# Altium PCB Analog voltmeter pcb.PcbDoc
Units mm, origin at the board's own origin, x right, y up, seen from the top; angles counter-clockwise.
Board outline 58.8 x 54.74 mm, 2 copper layers (Top Layer, Bottom Layer); 21 components, 17 nets, 76 pads, 1 vias.
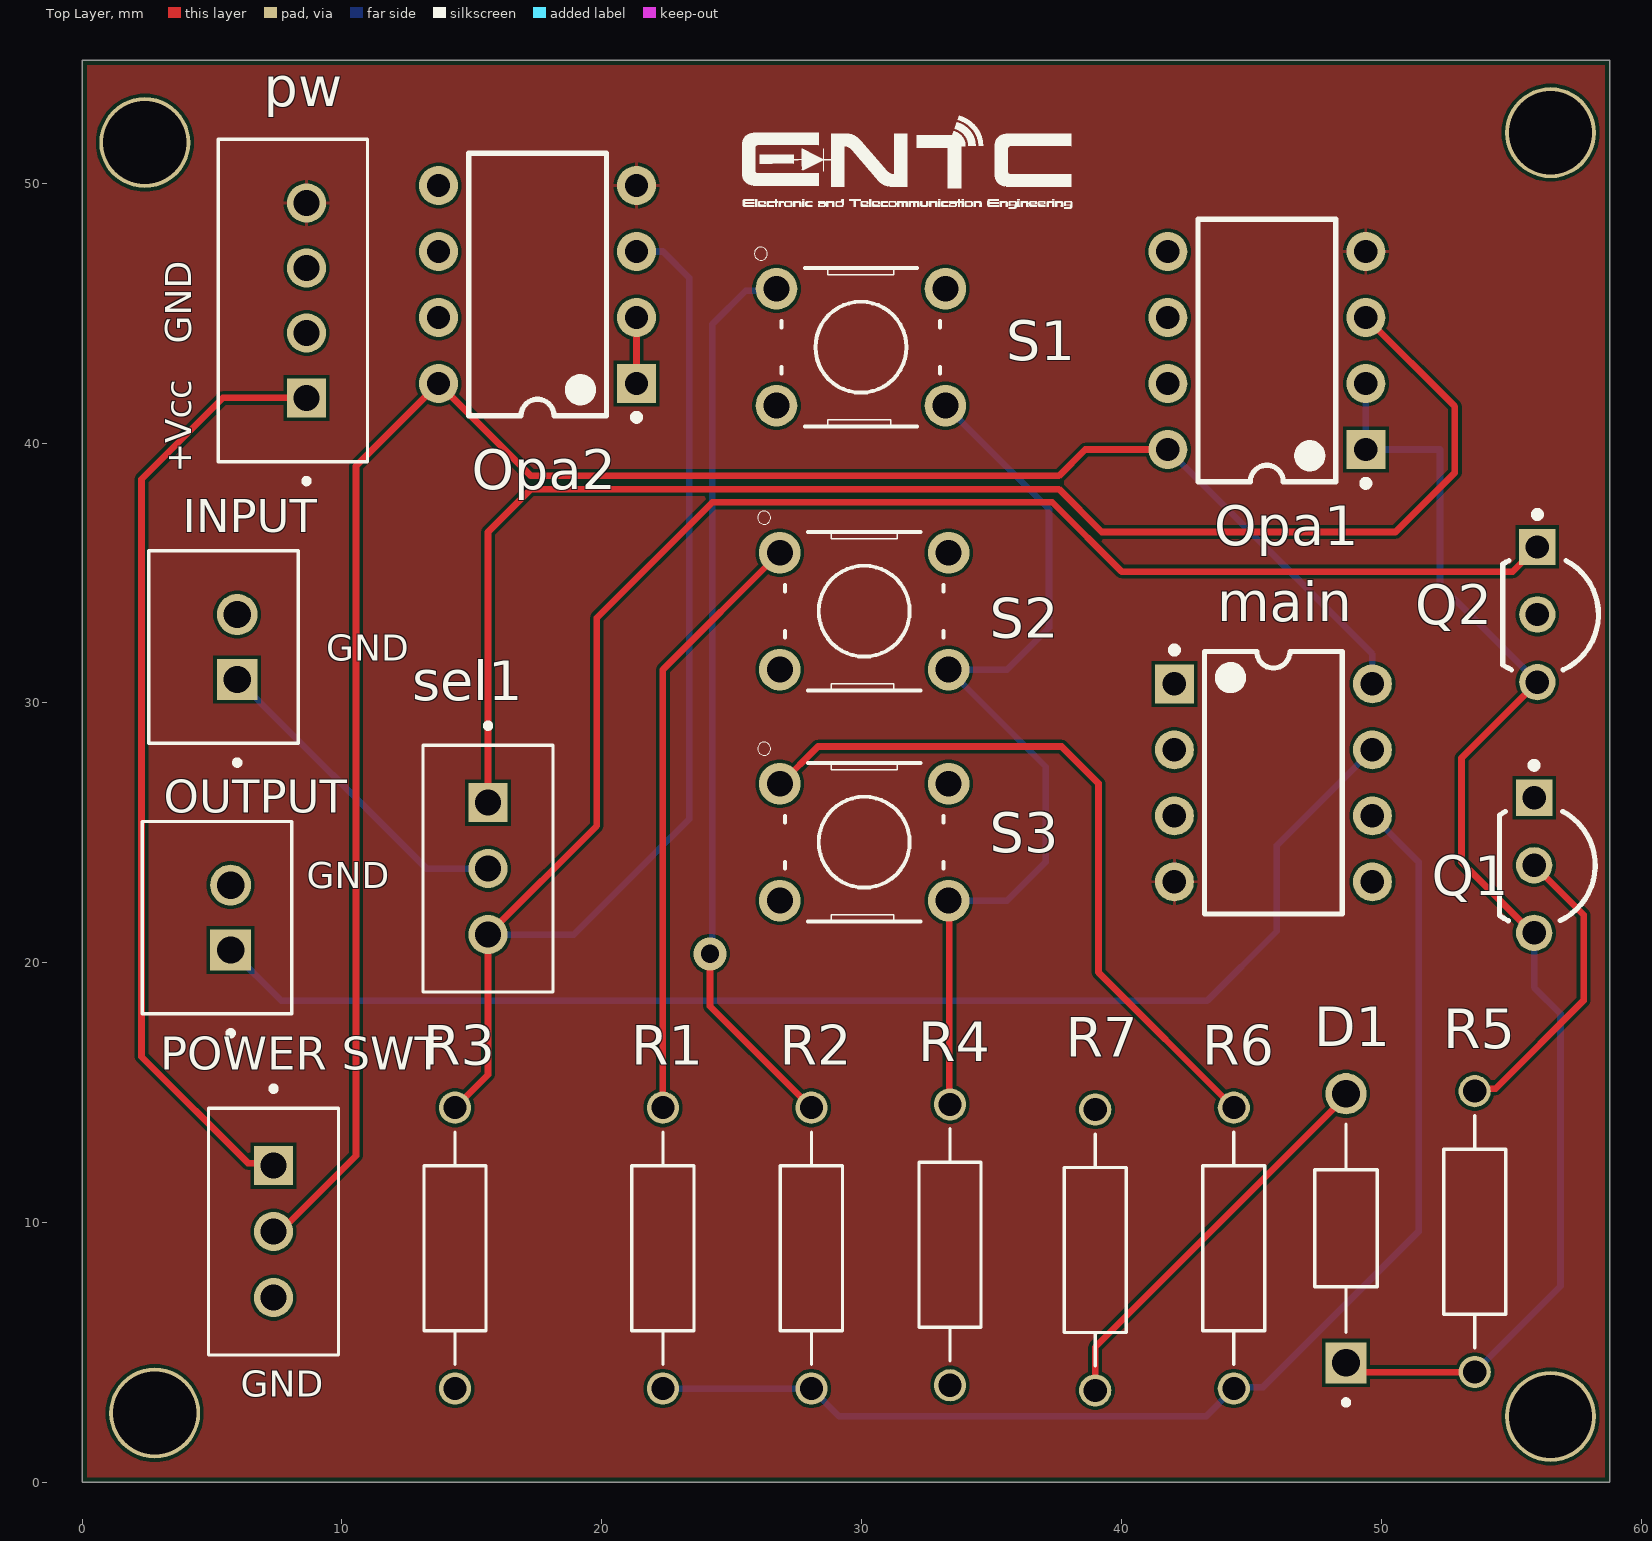
[diagram p0: Top Layer view]
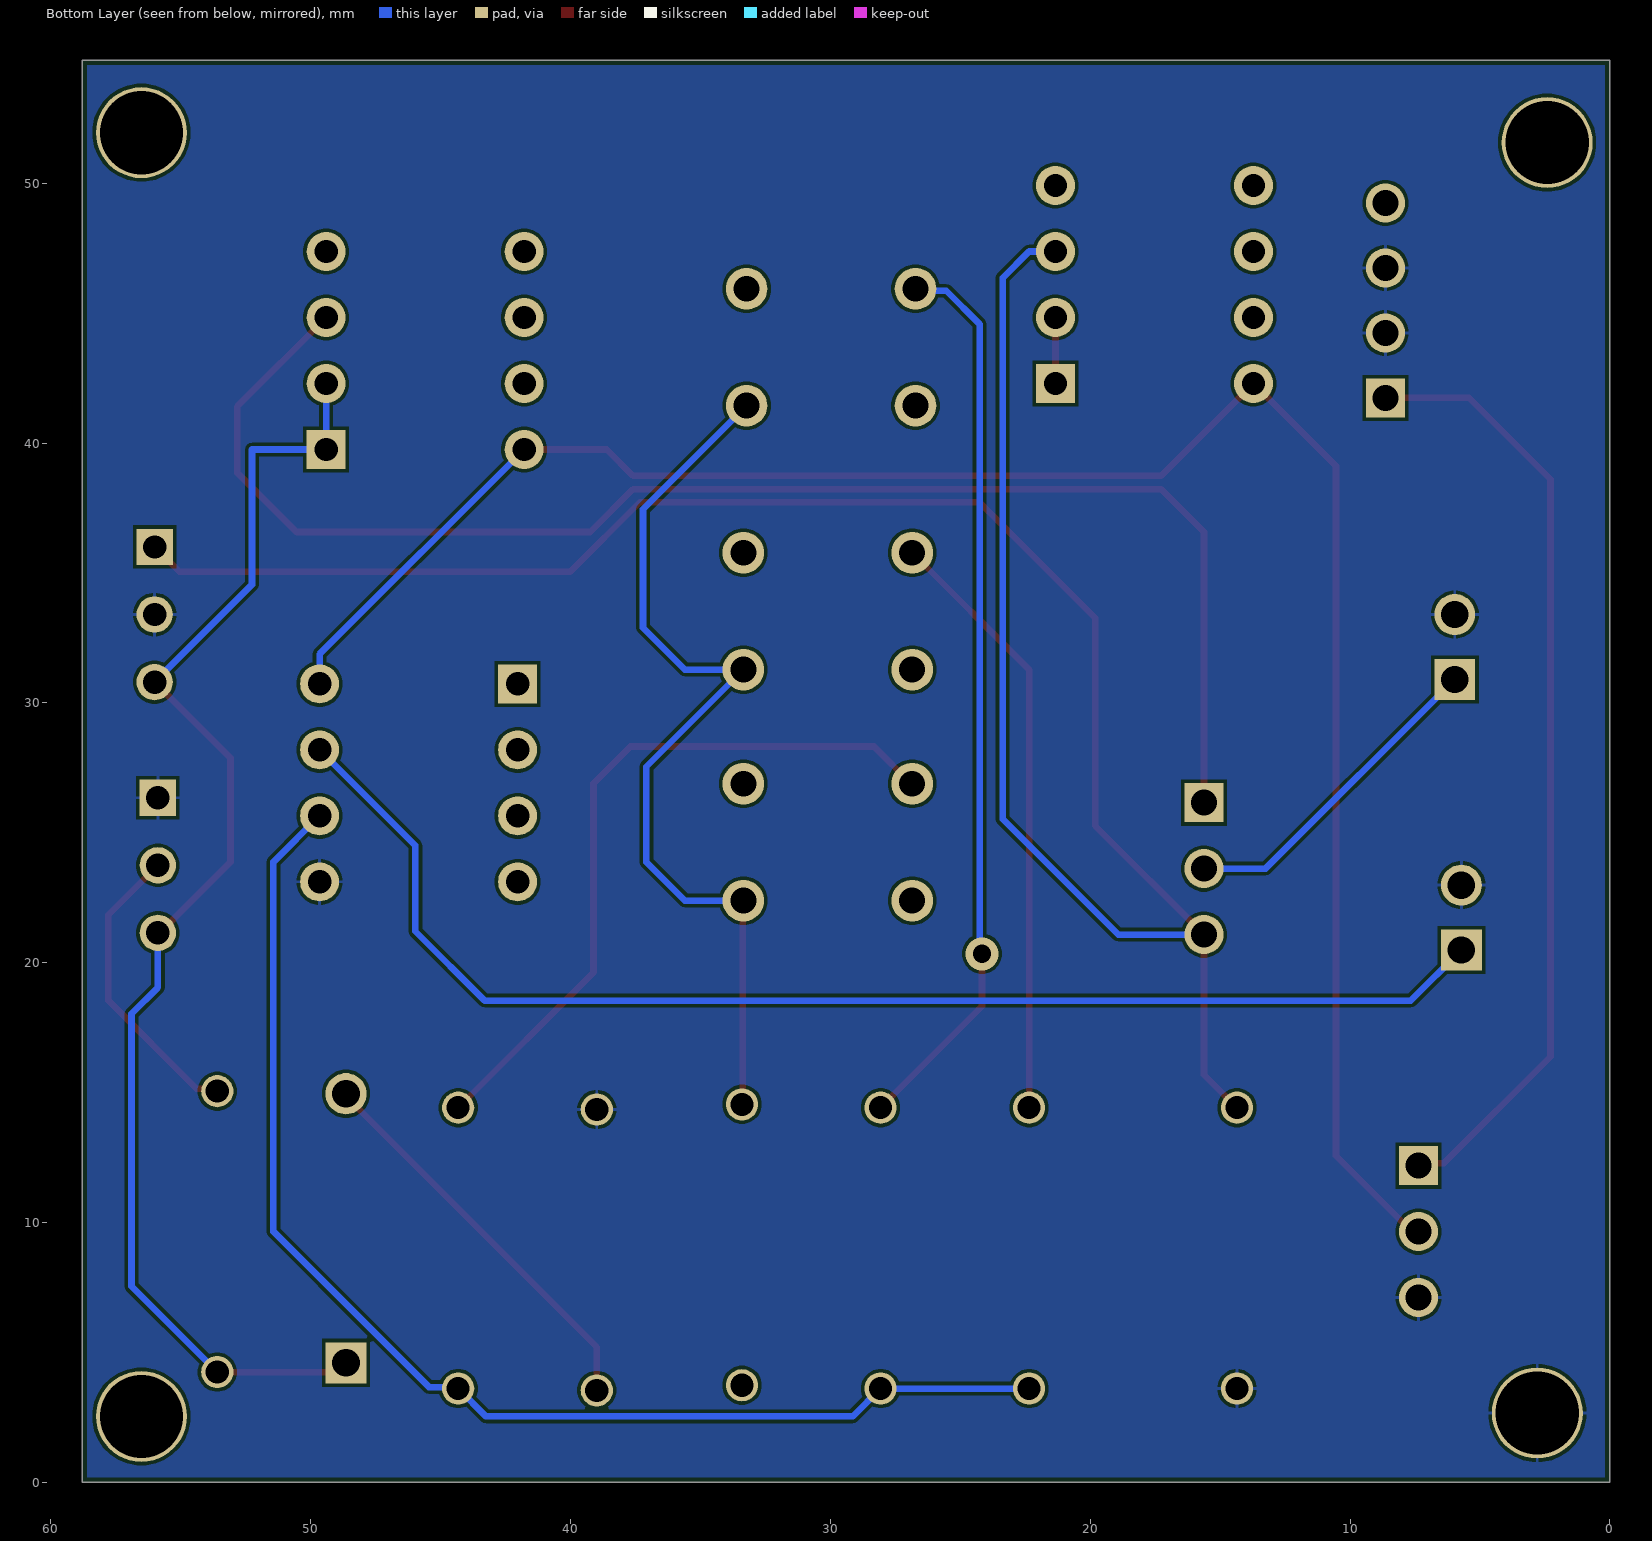
[diagram p1: Bottom Layer view, seen from below]
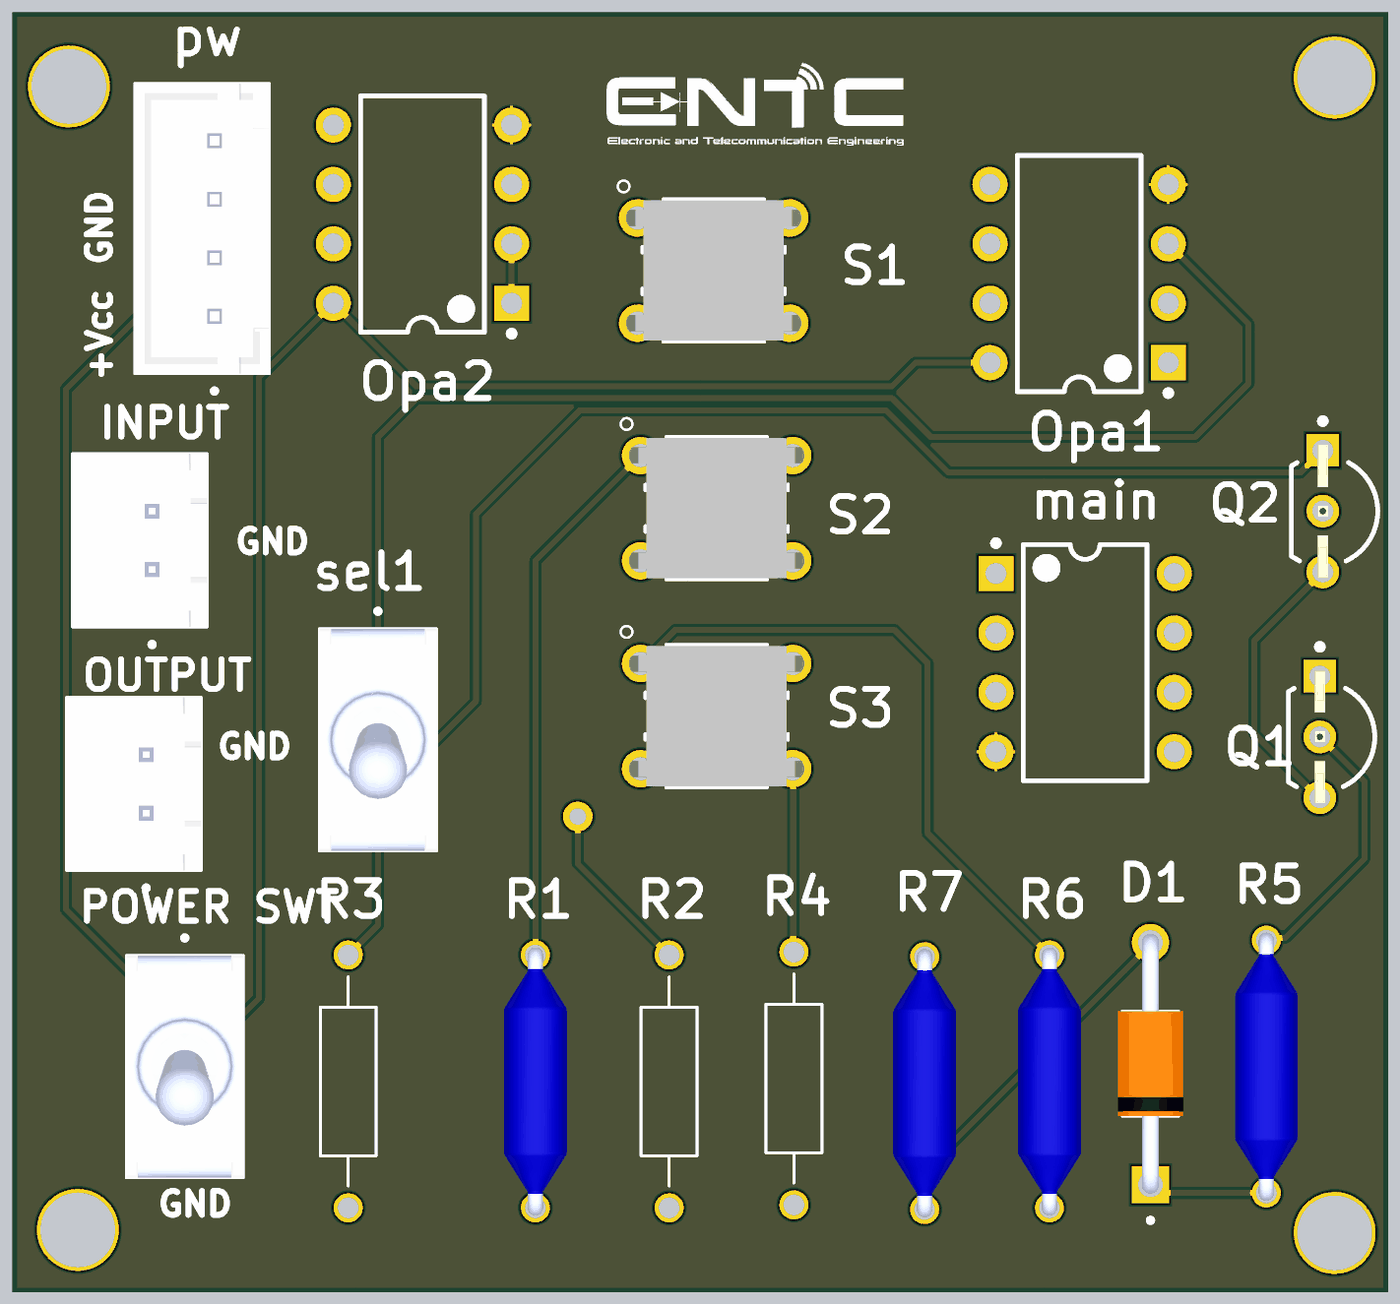
[diagram p2: 3D render of the assembled board from above, using the file's embedded part models]

## Layer stack, top to bottom
Top Solder: solder mask 0.0102, Solder Resist, Dk 3.5
Top Layer: signal copper 0.0356
Dielectric 1: dielectric 0.32, FR-4, Dk 4.8
Bottom Layer: signal copper 0.0356
Bottom Solder: solder mask 0.0102, Solder Resist, Dk 3.5

## Board outline
58.796,54.737 0,54.737 0,0 58.796,0

## Design rules (kind name [scope] priority, off if disabled: settings)
BoardOutlineClearance [All] p1: gap=0.2 ignorepadtopadclearanceinfootprint=FALSE
Clearance [All] p1: gap=0.127 ignorepadtopadclearanceinfootprint=FALSE except(0.25: Arc-Hole Track-Hole SMDPad-Hole THPad-Hole Via-Hole Fill-Hole Poly-Hole Region-Hole Text-Hole)
ComponentClearance [All] p1: gap=0.127 collisioncheckmode=3 verticalgap=0.127 showdistances=TRUE
DiffPairsRouting [All] p1: maxlimit=0.254 minlimit=0.127 mostfreqgap=0.127 toplayer_minwidth=0.127 toplayer_maxwidth=25.4 toplayer_prefwidth=0.127 bottomlayer_minwidth=0.127 bottomlayer_maxwidth=25.4 bottomlayer_prefwidth=0.127 maxuncoupledlength=12.7
Height [All] p1: minheight=0 maxheight=1816.048 prefheight=12.7
HoleSize [All] p1: absolutevalues=TRUE maxlimit=6.3 minlimit=0.3 maxpercent=80.000 minpercent=20.000
HoleToHoleClearance [All] p1: gap=0.25 allowstackedmicrovias=FALSE
MinimumAnnularRing [All] p1: minimumring=0.076
MinimumSolderMaskSliver [All] p1: minsoldermaskwidth=0
PlaneClearance [All] p1: clearance=0.127
PlaneConnect PlaneConnectPowerPads [InPadClass('PowerPads')] p1: planeconnectstyle=Direct reliefexpansion=0.508 reliefentries=4 reliefconductorwidth=0.254 reliefairgap=0.254
PlaneConnect [All] p2: pad.planeconnectstyle=Relief pad.reliefexpansion=0.3 pad.reliefentries=4 pad.reliefconductorwidth=0.127 pad.reliefairgap=0.127 via.planeconnectstyle=Direct via.reliefexpansion=0.3 via.reliefentries=4 via.reliefconductorwidth=0.127 via.reliefairgap=0.127
PolygonConnect PolygonConnectPowerPads [All vs (InPadClass('PowerPads'))] p1: connectstyle=Direct reliefconductorwidth=0.254 reliefentries=4 polygonreliefangle="90 Angle" airgapwidth=0.254
PolygonConnect [All] p2: thpad.connectstyle=Relief thpad.reliefconductorwidth=0.127 thpad.reliefentries=4 thpad.polygonreliefangle="90 Angle" thpad.airgapwidth=0.127 smdpad.connectstyle=Relief smdpad.reliefconductorwidth=0.127 smdpad.reliefentries=4 smdpad.polygonreliefangle="90 Angle" smdpad.airgapwidth=0.127 via.connectstyle=Direct via.reliefconductorwidth=0.127 via.reliefentries=4 via.polygonreliefangle="90 Angle" via.airgapwidth=0.127
RoutingVias [All] p1: holewidth=0.3 width=0.6 viastyle="Through Hole" minholewidth=0.3 minwidth=0.6 maxholewidth=0.6 maxwidth=6.6
SilkToSilkClearance [All] p1: silktosilkclearance=0
SilkToSolderMaskClearance [IsPad] p1: minsilkscreentomaskgap=0.127 clearancetoexposedcopper=TRUE
SolderMaskExpansion [All] p1: expansion=0.075 istentingtop=FALSE
Width [All] p1: maxlimit=25.4 minlimit=0.127 preferedwidth=0.127 minimp=50.000000 maximp=50.000000 favimp=50.000000
20 further rules are at their usual default settings.

## Components (designator, comment, footprint, x,y, rotation, side; value= is the part's Value field where it differs from the comment)
D1 "BZX85C16" DIOAD1036W73L450D282 48.641,9.779 r90 top
INPUT "B2B-XH-A(LF)(SN)" JST_B2B-XH-A(LF)(SN) 5.444,32.151 r90 top
main "LM358N" ONSC-PDIP-8-626-05_M 45.847,26.924 r0 top
Opa1 "LM358N" ONSC-PDIP-8-626-05_M 45.593,43.561 r180 top
Opa2 "LM358N" ONSC-PDIP-8-626-05_M 17.526,46.101 r180 top
OUTPUT "B2B-XH-A(LF)(SN)" JST_B2B-XH-A(LF)(SN) 5.19,21.737 r90 top
"POWER SWT" "ATE1D-2M3-10-Z" SW_ATE1D-2M3-10-Z 7.366,9.652 r90 top
pw "PW" JST_B4B-XH-A(LF)(SN) 8.111,45.486 r90 top
Q1 "BC558BRL1G" ONSC-TO-92-3-29-11_AM_BL 55.88,23.749 r270 top
Q2 "BC558BRL1G" ONSC-TO-92-3-29-11_AM_BL 56.007,33.401 r270 top
R1 "50kohm" RESAD1081W64L635D269 22.352,9.017 r90 top
R2 "100kohm" RESAD1081W64L635D269 28.067,9.017 r270 top
R3 "100kohm" RESAD1081W64L635D269 14.351,9.017 r90 top
R4 "100kohm" RESAD1081W64L635D269 33.401,9.144 r90 top
R5 "4.7kohm" RESAD1081W64L635D269 53.594,9.652 r90 top
R6 "400 kohm" RESAD1081W64L635D269 44.323,9.017 r270 top
R7 "4.7 kohm" RESAD1081W64L635D269 38.989,8.946 r90 top
S1 "B3F-1000" SW_B3F-1000 29.972,43.688 r0 top
S2 "B3F-1000" SW_B3F-1000 30.099,33.528 r0 top
S3 "B3F-1000" SW_B3F-1000 30.099,24.638 r0 top
sel1 "ATE1D-2M3-10-Z" SW_ATE1D-2M3-10-Z 15.621,23.622 r90 top

## Footprints (in the part's own frame and the unit in brackets; to place one, negate y for a bottom-side part, rotate by r counter-clockwise, add the part's x,y. Pads: shape width x height; smd on the part's side, far side on the other; paste and mask are expansions set on the pad)
DIOAD1036W73L450D282 [mm]
  round 1.59 hole 1.06: A(5.18,0)
  rect 1.59x1.59 / inner round 1.59 / far side rect 1.59x1.59 hole 1.06: C(-5.18,0)
  silkscreen extent -6.8,-1.2 4,1.2, body extent -5.55,-1.4 5.55,1.4, height 2.8
JST_B2B-XH-A(LF)(SN) [mm]
  rect 1.575x1.575 / inner round 1.575 / far side rect 1.575x1.575 hole 1.05: 1(-1.25,-0.525)
  round 1.575 hole 1.05: 2(1.25,-0.525)
  silkscreen extent -4.55,-2.87 3.7,2.88, body extent -3.7,-2.88 3.7,2.88, height 7
JST_B4B-XH-A(LF)(SN) [mm]
  rect 1.508x1.508 / inner round 1.508 / far side rect 1.508x1.508 hole 1: 1(-3.75,-0.525)
  round 1.508 hole 1: 2(-1.25,-0.525) 3(1.25,-0.525) 4(3.75,-0.525)
  silkscreen extent -7.05,-2.88 6.2,2.87, body extent -6.2,-2.88 6.2,2.88, height 7
ONSC-PDIP-8-626-05_M [mm] "DIP, 8-Leads, Body 10x7.1mm, Pitch 2.54mm"
  rect 1.5x1.5 hole 0.9: 1(-3.81,3.81)
  round 1.5 hole 0.9: 2(-3.81,1.27) 3(-3.81,-1.27) 4(-3.81,-3.81) 5(3.81,-3.81) 6(3.81,-1.27) 7(3.81,1.27) 8(3.81,3.81)
  silkscreen extent -3.93,-5.05 2.65,5.23, body extent -3.95,-5 3.95,5, height 5.33
ONSC-TO-92-3-29-11_AM_BL [mm] "TO, 3-Leads, Body Dia 4.7mm, Pitch 2.6mm"
  rect 1.4x1.4 hole 0.9: 1(-2.6,0)
  round 1.4 hole 0.9: 2(0,0) 3(2.6,0)
  silkscreen extent -3.97,-1.34 2.13,2.35, body extent -2.84,-1.34 2.84,2.35, height 5.33
RESAD1081W64L635D269 [mm]
  round 1.24 hole 0.89: 1(-5.405,0) 2(5.405,0)
  silkscreen extent -4.47,-1.2 4.47,1.2, body extent -5.72,-1.35 5.72,1.35, height 2.69
SW_ATE1D-2M3-10-Z [mm]
  rect 1.508x1.508 hole 1: 1(2.54,0)
  round 1.508 hole 1: 2(0,0) 3(-2.54,0)
  silkscreen extent -4.75,-2.5 5.6,2.5, body extent -4.75,-2.5 4.75,2.5, height 18
SW_B3F-1000 [mm]
  round 1.6 hole 1: 1(-3.25,2.25) 2(3.25,2.25) 3(-3.25,-2.25) 4(3.25,-2.25)
  silkscreen extent -4.1,-3.05 3.05,3.85, body extent -3.85,-3 3.85,3, height 4.3

## Part data
D1: Package=None, Availability=Unavailable, MP=BZX85C16, Price=None
INPUT OUTPUT: "Connector Header Through Hole 2 position 0.098 (2.50mm)", Package=None, Check_prices=https://www.snapeda.com/parts/B2B-XH-A(LF)(SN)/JST+Sales+America+Inc./view-part/?ref=eda, MF="JST Sales", MP=B2B-XH-A(LF)(SN), SnapEDA_Link=https://www.snapeda.com/parts/B2B-XH-A(LF)(SN)/JST+Sales+America+Inc./view-part/?ref=snap
main Opa1 Opa2: library part CMP-1310-00098-1, "Single Supply Dual Operational Amplifier, 3 to 32 V, 0 to 70 degC, 8-Pin PDIP, Tube", Manufacturer="On Semiconductor", ComponentLink1Description="Manufacturer URL", ComponentLink1URL=http://www.onsemi.com/, ComponentLink2Description=Datasheet, ComponentLink2URL=http://www.onsemi.cn/pub_link/Collateral/LM358-D.PDF, ComponentLink3Description="Package Specification", ComponentLink3URL=http://www.onsemi.com/pub_link/Collateral/LM211-D.PDF, DatasheetVersion="Rev. 27", Mounting Technology="Through Hole", PackageDescription="8-Pin Plastic Dual-In Line Package, Body 9.52 x 6.605 mm, Pitch 2.54 mm", PackageReference=PDIP-8-626-05, PackageVersion="Rev. M, 04/2010", Packing=Tube, PartNumber=LM358N, RoHS=FALSE, VCC Max (V)=32, VCC Min (V)=3
"POWER SWT" sel1: "Toggle Switch SPDT Through Hole", Package=None, Check_prices=https://www.snapeda.com/parts/ATE1D-2M3-10-Z/Nidec+Copal+Electronics/view-part/?ref=eda, Digi-Key_Part_Number=563-1157-ND, MF="Nidec Copal Electronics", MP=ATE1D-2M3-10-Z, Purchase-URL=https://pricing.snapeda.com/search/part/ATE1D-2M3-10-Z/?ref=eda, SnapEDA_Link=https://www.snapeda.com/parts/ATE1D-2M3-10-Z/Nidec+Copal+Electronics/view-part/?ref=snap
pw: library part B4B-XH-A(LF)(SN), "Connector Header Through Hole 4 position 0.098 (2.50mm)", Package=None, Availability="In Stock", Check_prices=https://www.snapeda.com/parts/B4B-XH-A(LF)(SN)/JST+Sales+America+Inc./view-part/?ref=eda, MF="JST Sales", MP=B4B-XH-A(LF)(SN), Price=None, Purchase-URL=https://pricing.snapeda.com/search/part/B4B-XH-A(LF)(SN)/?ref=eda, SnapEDA_Link=https://www.snapeda.com/parts/B4B-XH-A(LF)(SN)/JST+Sales+America+Inc./view-part/?ref=snap
Q1 Q2: library part CMP-1048-01513-1, "Amplifier Transistor, PNP Silicon, 3-Pin TO-92, Pb-Free, Tape and Reel", Manufacturer="On Semiconductor", ComponentLink1Description="Manufacturer URL", ComponentLink1URL=http://www.onsemi.com/, ComponentLink2Description=Datasheet, ComponentLink2URL=http://www.onsemi.com/pub_link/Collateral/BC556B-D.PDF, ComponentLink3Description="Package Specification", ComponentLink3URL=http://www.onsemi.com/pub_link/Collateral/MAC97-D.PDF, DatasheetVersion="Rev. 3", IC Continuous (A)=-0.1, Mounting Technology="Through Hole", PackageDescription="3-Pin Transistor Outline, Body 4.825 x 3.685 mm, Pitch 1.27 mm", PackageReference=TO-92-3-29-11_AM_BL, PackageVersion="Rev. AM", Packing="Tape and Reel", PartNumber=BC558BRL1G, Polarity=PNP, RoHS=TRUE
R1: library part RNC55J5002BSB14, "Resistor,Metal Film,ERC-55 50K .1% T-9 RNC55J5002BS B14", Package="erc55 Vishay", Check_prices=https://www.snapeda.com/parts/RNC55J5002BSB14/Vishay/view-part/?ref=eda, MF=Vishay, MP=RNC55J5002BSB14, SnapEDA_Link=https://www.snapeda.com/parts/RNC55J5002BSB14/Vishay/view-part/?ref=snap
R2 R3 R4: library part RNC55H1003FSRE6, "100 kOhms Â±1% 0.125W, 1/8W Through Hole Resistor Axial Military, Moisture Resistant, Weldable Metal Film", Package=None, Availability="In Stock", Check_prices=https://www.snapeda.com/parts/RNC55H1003FSRE6/Vishay/view-part/?ref=eda, MF=Vishay, MP=RNC55H1003FSRE6, Price=None, Purchase-URL=https://pricing.snapeda.com/search/part/RNC55H1003FSRE6/?ref=eda, SnapEDA_Link=https://www.snapeda.com/parts/RNC55H1003FSRE6/Vishay/view-part/?ref=snap
R5 R7: library part RNC55K4701FSRE6, "Res Metal Film 4.7K Ohm 1% 0.125W(1/8W) Â±100ppm/Â°C 0.001% Epoxy AXL T/R", Package="erc55 Vishay", Check_prices=https://www.snapeda.com/parts/RNC55K4701FSRE6/Vishay/view-part/?ref=eda, MF=Vishay, MP=RNC55K4701FSRE6, SnapEDA_Link=https://www.snapeda.com/parts/RNC55K4701FSRE6/Vishay/view-part/?ref=snap
R6: library part RNC55J4003FSB14, "Resistor,Metal Film,ERC-55 400K 1% T-9 RNC55J4003FS B14", Package="erc55 Vishay", Check_prices=https://www.snapeda.com/parts/RNC55J4003FSB14/Vishay/view-part/?ref=eda, MF=Vishay, MP=RNC55J4003FSB14, SnapEDA_Link=https://www.snapeda.com/parts/RNC55J4003FSB14/Vishay/view-part/?ref=snap
S1 S2 S3: "Tactile Switch SPST-NO Top Actuated Through Hole", Package=None, Availability="In Stock", Check_prices=https://www.snapeda.com/parts/B3F-1000/Omron+Electronics+Inc-EMC+Div/view-part/?ref=eda, MF=Omron, MP=B3F-1000, Price=None, Purchase-URL=https://pricing.snapeda.com/search/part/B3F-1000/?ref=eda, SnapEDA_Link=https://www.snapeda.com/parts/B3F-1000/Omron+Electronics+Inc-EMC+Div/view-part/?ref=snap

## Free pads (board coordinates)
  round 3.5 hole 3.2: 2(2.413,51.562) 2(2.794,2.667) 2(56.515,2.54) 2(56.515,51.943)

## Via types
v1: diameter 1.27, hole 0.711, Top Layer to Bottom Layer, 1 vias

## Nets (pads, with @x,y where several pads share a name; then routed paths per layer and width w, separated by ;. In a path a pad name is that pad's centre, name@x,y a point inside that pad or via, vN(x,y) a via of type N, cw(c..) or ccw(c..) an arc to the next point about the centre after c; other vN are vias at no path point)
GND: "POWER SWT.3" INPUT.2 main.5 OUTPUT.2 pad.2@2.794,2.667 pw.2 pw.3 Q1.1 Q2.2 R3.1 R7.2
NetD1_A: D1.A R7.1 | length 15.2
  Top Layer w0.254: R7.1 38.989,5.207 D1.A@48.586,14.804
NetD1_C: D1.C Opa1.1 Opa1.2 Q1.3 Q2.3 R5.1 | length 52.2
  Top Layer w0.254: D1.C@48.387,4.853 48.993,4.247 R5.1 ; Q1.3@55.88,21.101 Q1.3 55.813,21.149 53.086,23.876 53.086,27.88 Q2.3
  Bottom Layer w0.254: Opa1.2 Opa1.1 52.257,39.751 52.257,34.551 Q2.3 ; R5.1 56.896,7.549 56.896,18.034 55.88,19.05 Q1.3
NetINPUT_1: INPUT.1 sel1.2 | length 12.7
  Bottom Layer w0.254: INPUT.1 13.248,23.622 sel1.2
Netmain_4: main.4 Opa1.4 Opa2.4 pw.4
Netmain_6: main.6 R1.1 R2.2 R6.2 | length 49.2
  Bottom Layer w0.254: R1.1 R2.2 29.139,2.54 43.251,2.54 R6.2 44.379,3.668 45.451,3.668 51.435,9.652 51.435,23.876 main.6
Netmain_7: main.7 OUTPUT.1 | length 50.7
  Bottom Layer w0.254: OUTPUT.1 7.66,18.542 43.307,18.542 45.974,21.209 45.974,24.511 main.7
Netmain_8: "POWER SWT.2" main.8 Opa1.8 Opa2.8 | length 77.6
  Top Layer w0.254: 7.493,9.525 10.541,12.573 10.541,39.116 Opa2.8 17.272,38.735 37.592,38.735 38.608,39.751 Opa1.8
  Bottom Layer w0.254: Opa1.8 49.657,31.877 main.8
NetOpa1_3: Opa1.3 sel1.1 | length 57.3
  Top Layer w0.254: sel1.1 15.621,36.576 17.272,38.227 37.592,38.227 39.243,36.576 50.546,36.576 52.832,38.862 52.832,41.402 Opa1.3
NetOpa2_1: Opa2.1 Opa2.2 | length 2.5
  Top Layer w0.254: Opa2.1 Opa2.2
NetOpa2_3: Opa2.3 Q2.1 R3.2 sel1.3 | length 93.5
  Top Layer w0.254: R3.2 15.621,15.692 sel1.3 19.805,25.266 19.805,33.267 24.257,37.719 37.338,37.719 40.005,35.052 55.058,35.052 Q2.1
  Bottom Layer w0.254: sel1.3 18.923,21.082 23.368,25.527 23.368,46.355 22.352,47.371 Opa2.3
"NetPOWER SWT_1": "POWER SWT.1" pw.1 | length 36.7
  Top Layer w0.254: 7.366,12.192 7.269,12.289 6.38,12.289 2.286,16.383 2.286,38.608 5.414,41.736 pw.1
NetQ1_2: Q1.2 R5.2 | length 11.6
  Top Layer w0.254: R5.2 53.695,15.158 54.401,15.158 57.785,18.542 57.785,21.844 Q1.2
NetR1_2: R1.2 S2.1 | length 23.2
  Top Layer w0.254: R1.2 22.352,31.281 S2.1
NetR2_1: R2.1 S1.1 | length 34.8
  Top Layer w0.254: v1(24.164,20.343) 24.164,18.325 R2.1
  Bottom Layer w0.254: v1(24.164,20.343) 24.257,20.436 24.257,44.577 25.541,45.861 26.645,45.861 S1.1
NetR4_2: R4.2 S1.4 S2.4 S3.4 | length 35.9
  Top Layer w0.254: R4.2@33.375,14.575 S3.4@33.375,22.362
  Bottom Layer w0.254: S1.4 37.211,37.449 37.211,32.893 35.596,31.278 S2.4 37.084,27.543 37.084,23.876 35.596,22.388 S3.4 S3.4@33.375,22.362 ; R4.2@33.375,14.575 R4.2
NetR6_1: R6.1 S3.1 | length 28.1
  Top Layer w0.254: S3.1 26.888,26.888 28.321,28.321 37.697,28.321 39.116,26.902 39.116,19.629 R6.1
pads on no net: main.1 main.2 main.3 Opa1.5 Opa1.6 Opa1.7 Opa2.5 Opa2.6 Opa2.7 R4.1 S1.2 S1.3 S2.2 S2.3 S3.2 S3.3

## Polygon pours and split planes (outlines as drawn)
Netmain_4 on Top Layer "NETMAIN_4_L01_P000" (solid, pour order 0): 58.796,54.737 0,54.737 0,0 58.796,0
GND on Bottom Layer "GND_L02_P001" (solid, pour order 1): 58.796,54.737 0,54.737 0,0 58.796,0

## Silkscreen, mask and mechanical layers (free items; w line width, h text height)
Top Overlay:
  drawing of 52 lines, arcs and shapes, not listed
  text "GND" at 4.191,43.815 h1.02 r90
  text "+Vcc" at 4.191,38.862 h1 r90
  text "GND" at 9.398,31.623 h1.02
  text "GND" at 8.636,22.86 h1.02
  text "GND" at 6.096,3.302 h1.02
Mechanical 13:
  lines w0.381: 0,0.127 0,54.737 58.674,54.737 58.674,0.127 0,0.127